# Altium PCB PBC-full.PcbDoc
Units mil, origin at the board's own origin, x right, y up, seen from the top; angles counter-clockwise.
Board outline 3150 x 2575 mil, 2 copper layers (Top Layer, Bottom Layer); 75 components, 86 nets, 314 pads, 107 vias.
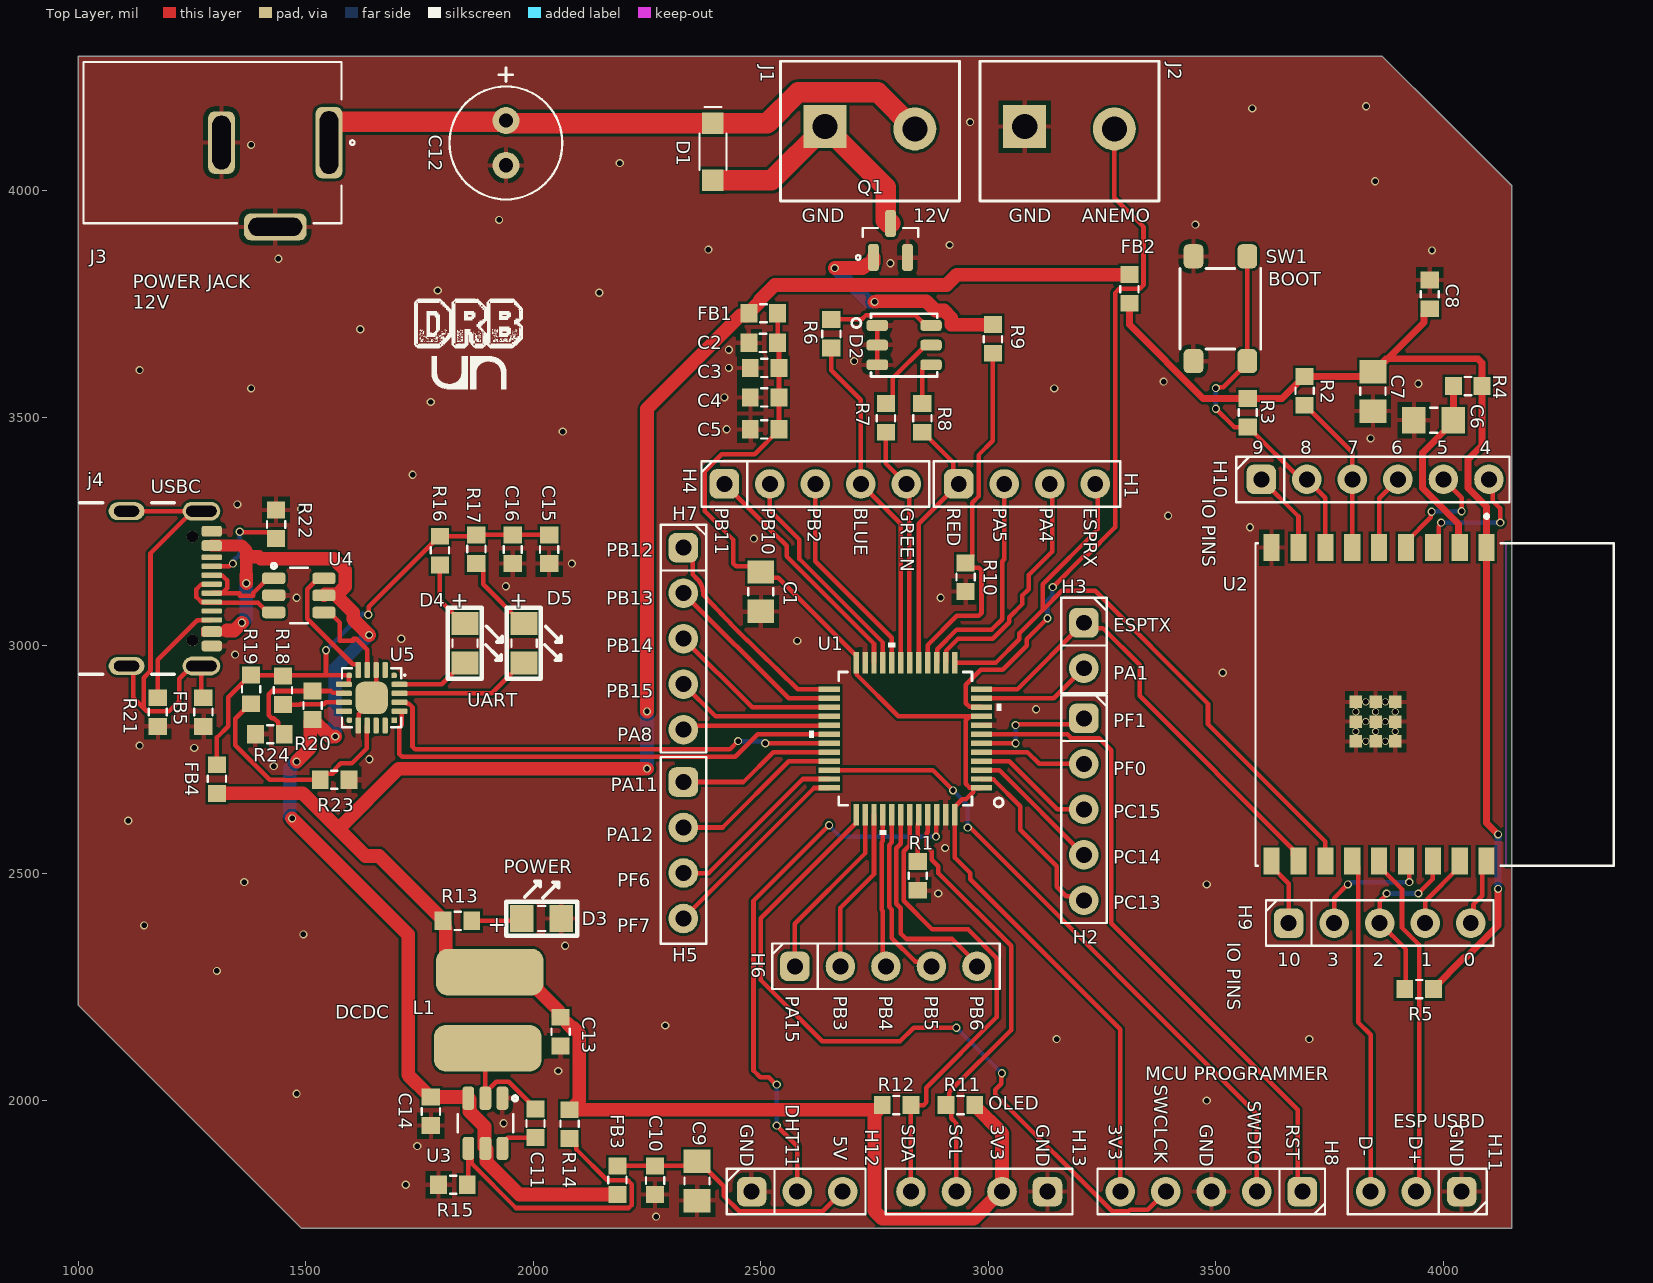
[diagram p0: Top Layer view]
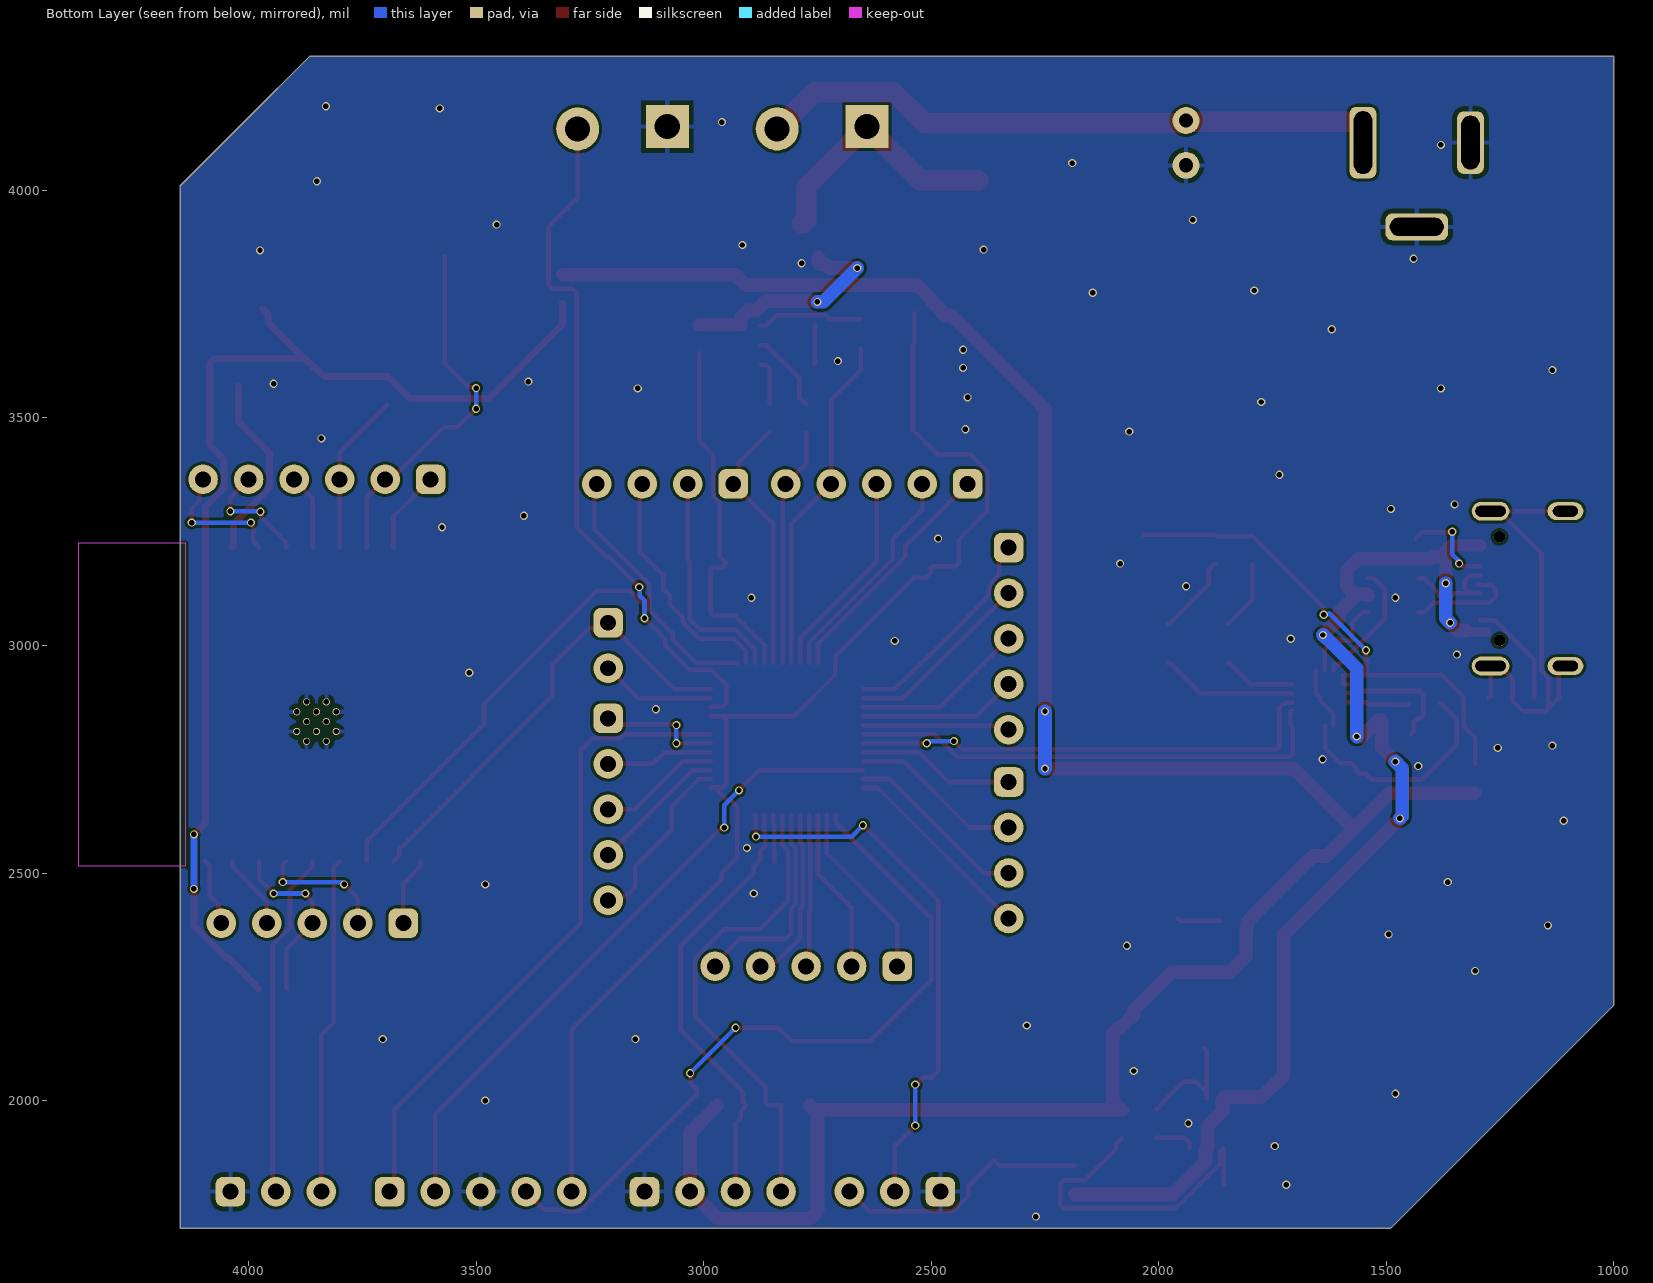
[diagram p1: Bottom Layer view, seen from below]
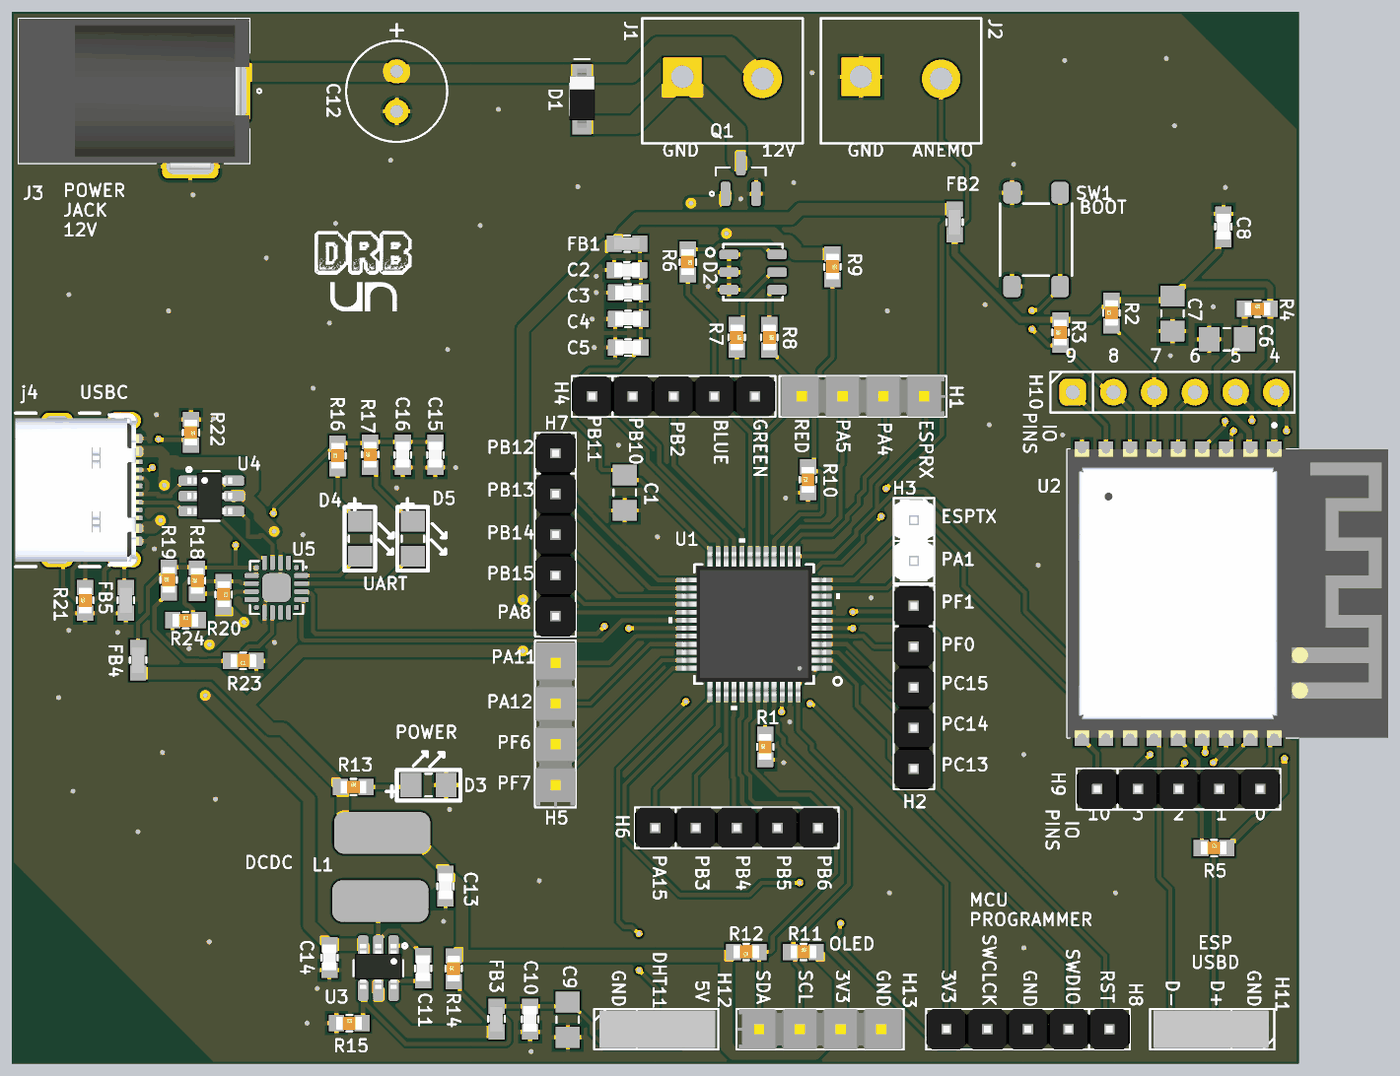
[diagram p2: 3D render of the assembled board from above, using the file's embedded part models]

## Layer stack, top to bottom
Top Solder: solder mask 0.4, Solder Resist, Dk 3.5
Top Layer: signal copper 1.4
Dielectric 1: dielectric 12.6, FR-4, Dk 4.8
Bottom Layer: signal copper 1.4
Bottom Solder: solder mask 0.4, Solder Resist, Dk 3.5

## Board outline
1490,1720 1000,2210 1000,4295 3865,4295 4005,4155 4150,4010 4150,1720

## Design rules (kind name [scope] priority, off if disabled: settings)
Clearance [All] p1: gap=6 ignorepadtopadclearanceinfootprint=FALSE
DiffPairsRouting DiffPairsRouting_USB [InDifferentialPairClass('USB_2.0_MCU') and InDifferentialPairClass('USB_2.0_ESP')] p1: maxlimit=6 minlimit=6 mostfreqgap=6 toplayer_minwidth=11 toplayer_maxwidth=31 toplayer_prefwidth=31 bottomlayer_minwidth=11 bottomlayer_maxwidth=31 bottomlayer_prefwidth=31 maxuncoupledlength=500
HoleSize [All] p1: absolutevalues=TRUE maxlimit=1000 minlimit=10 maxpercent=80.000 minpercent=20.000
MatchedLengths [InDifferentialPairClass('USB_2.0_MCU') and InDifferentialPairClass('USB_2.0_ESP')] p1: tolerance=50 checknetsindiffpair=TRUE checkdiffpairvsdiffpair=FALSE checkxsignals=FALSE checkothers=FALSE
MinimumSolderMaskSliver [All] p1: minsoldermaskwidth=4
PolygonConnect PolygonConnect_via [IsVia] p1: connectstyle=Direct reliefconductorwidth=10 reliefentries=4 polygonreliefangle="90 Angle" airgapwidth=10
PolygonConnect [All] p2: connectstyle=Relief reliefconductorwidth=10 reliefentries=4 polygonreliefangle="90 Angle" airgapwidth=10
RoutingVias [All] p1: holewidth=12 width=18 viastyle="Through Hole" minholewidth=12 minwidth=18 maxholewidth=1000 maxwidth=1000
SilkToSilkClearance [All] p1: silktosilkclearance=1
SilkToSolderMaskClearance [IsPad] p1: minsilkscreentomaskgap=1 clearancetoexposedcopper=TRUE
SolderMaskExpansion [All] p1: expansion=4 istentingtop=FALSE
SupplyNets "Schematic Supply Nets_6" [InNet('3V3_ESP32')] p1: voltage=0.000
SupplyNets "Schematic Supply Nets_5" [InNet('3V3_CP')] p2: voltage=0.000
SupplyNets "Schematic Supply Nets_4" [InNet('VUSB')] p3: voltage=0.000
SupplyNets "Schematic Supply Nets_3" [InNet('3V3_MCU')] p4: voltage=0.000
SupplyNets "Schematic Supply Nets_2" [InNet('3V3')] p5: voltage=0.000
SupplyNets "Schematic Supply Nets_1" [InNet('GND')] p6: voltage=0.000
SupplyNets "Schematic Supply Nets" [InNet('12V')] p7: voltage=0.000
Width Width_2A [InNetClass('12V_2A')] p1: maxlimit=45 minlimit=10 preferedwidth=45
Width Width_1A [InNetClass('5V_1A')] p2: maxlimit=30 minlimit=10 preferedwidth=30
Width Width_3V3_1A [InNet('3V3')] p3: maxlimit=30 minlimit=10 preferedwidth=30
Width Width_0.5A [InNet('3V3_ESP32')] p4: maxlimit=20 minlimit=15 preferedwidth=20
Width [All] p5: maxlimit=60 minlimit=6 preferedwidth=10
25 further rules are at their usual default settings.

## Classes and differential pairs
differential pair class USB_2.0_MCU: DATA USB_D
differential pair class USB_2.0_ESP: ESP_USBD
net class 12V_2A: 12V NetD1_2
net class 5V_1A: 3V3 NetC11_1 NetC11_2 VUSB
component class Designator: C9 C10 D1 D2 FB3 H12 J1 J2 Q1 R6 R7 R8 R9 R10 R11 R12 SDA
differential pair USB_D: +USB_D_P -USB_D_N
differential pair ESP_USBD: +ESP_USBD_P -ESP_USBD_N
differential pair DATA: +DATA_P -DATA_N

## Components (designator, comment, footprint, x,y, rotation, side; value= is the part's Value field where it differs from the comment)
C1 "10uF 25V" 0805_cap 2500,3118.31 r270 top value=10uF
C2 "0.1uF 50V" 0603_cap 2505.5,3665 r180 top value=0.1uF
C3 "0.1uF 50V" 0603_cap 2508.5,3610 r180 top value=0.1uF
C4 "0.1uF 50V" 0603_cap 2508.5,3545 r180 top value=0.1uF
C5 "0.1uF 50V" 0603_cap 2508.5,3475 r180 top value=0.1uF
C6 "10uF 25V" 0805_cap 3978.31,3495 r180 top value=10uF
C7 "10uF 25V" 0805_cap 3845,3558.31 r270 top value=10uF
C8 "0.1uF 50V" 0603_cap 3970,3771.5 r90 top value=0.1uF
C9 "10uF 25V" 0805_cap 2360,1823.31 r270 top value=10uF
C10 "0.1uF 50V" 0603_cap 2267.74,1825 r270 top value=0.1uF
C11 "0.1uF 50V" 0603_cap 2005,1950 r270 top value=0.1uF
C12 "100uF 35V" CAP_TH_2.5MM_6.3*12MM 1940,4104.21 r270 top value=100uF
C13 "22uF 10V" 0603_cap 2060,2151.5 r270 top value=22uF
C14 "10uF 10V" 0603_cap 1775,1976.5 r270 top value=10uF
C15 "10uF 10V" 0603_cap 2035,3211.5 r270 top value=10uF
C16 "0.1uF 50V" 0603_cap 1955,3211.5 r270 top value=0.1uF
D1 "40V 1A" SOD_123 2395,4085 r270 top
D2 "RGB" RGB_NS_3.5X3.7 2815,3660 r0 top
D3 "2.9V" 0805_LED 2018.31,2400 r0 top
D4 "2.9V" 0805_LED 1850,3005 r270 top
D5 "2V" 0805_LED 1980,3005 r270 top
FB1 "60OHM 2A" 0603_fb 2505.5,3730 r0 top value="60 OHM"
FB2 "60OHM 2A" 0603_fb 3310,3783.5 r270 top value="60 OHM"
FB3 "60OHM 2A" 0603_fb 2185,1825 r90 top value="60 OHM"
FB4 "60OHM 2A" 0603_fb 1305,2706.5 r90 top value="60 OHM"
FB5 "60OHM 2A" 0603_fb 1275,2853.5 r90 top value="60 OHM"
H1 "4x1" H_4x1_TH_2.54mm 3085,3355 r0 top
H2 "5x1" H_5x1_TH_100mil 3210,2640 r270 top
H3 "2x1" H_2x1_TH_100mil 3210,3000 r270 top
H4 "5x1" H_5x1_TH_100mil 2620,3355 r0 top
H5 "4x1" H_4x1_TH_2.54mm 2330,2550 r270 top
H6 "5x1" H_5x1_TH_100mil 2775,2295 r0 top
H7 "5x1" H_5x1_TH_100mil 2330,3015 r270 top
H8 "5x1" H_5x1_TH_100mil 3490,1800 r180 top
H9 "5x1" H_5x1_TH_100mil 3860,2390 r0 top
H10 "6x1" H_6x1_TH_100mil 3850,3365 r0 top
H11 "3x1" H_3X1_TH_100mil 3940,1800 r180 top
H12 "3x1" H_3X1_TH_100mil 2580,1800 r0 top
H13 "4x1" H_4x1_TH_2.54mm 2980,1800 r180 top
J1 "Connector 2pos" CON_2x1_TH_5MM 2740,4130 r0 top
J2 "Connector 2pos" CON_2x1_TH_5MM 3178.43,4130 r0 top
J3 "PWR JACK 2.1mm" CON_POWER_BARREL_2.1MM_3CONN 1433.11,4105 r270 top
j4 "USB C" CON_USB_C_16P_RA 1200,3125 r270 top
L1 "2.2uH 4A" Ind_5.8*5.2_NS 1902.1,2198.66 r90 top value=2.2uH
Q1 "N CH" SOT_23_3 2785,3890 r90 top
R1 "10k 1/10W" 0603_res 2845,2493.5 r90 top value=10k
R2 "1k 1/10W" 0603_res 3695,3559.5 r90 top value=1k
R3 "1k 1/10W" 0603_res 3570,3511.5 r90 top value=1k
R4 "1k 1/10W" 0603_res 4053.5,3570 r0 top value=1k
R5 "1k 1/10W" 0603_res 3946.5,2245 r0 top value=1k
R6 "100R 1/10W" 0603_res 2655,3685 r270 top value=100R
R7 "100R 1/10W" 0603_res 2775,3500 r270 top value=100R
R8 "100R 1/10W" 0603_res 2855,3500 r270 top value=100R
R9 "10k 1/10W" 0603_res 3010,3673.5 r270 top value=10k
R10 "10k 1/10W" 0603_res 2950,3150 r90 top value=10k
R11 "10k 1/10W" 0603_res 2938.5,1990 r0 top value=10k
R12 "10k 1/10W" 0603_res 2798.5,1990 r180 top value=10k
R13 "84R5 1/10W" 0603_res 1833.5,2395 r0 top value=84R5
R14 "33k2 1/10W" 0603_res 2080,1948.5 r90 top value=33k2
R15 "10k 1/10W" 0603_res 1823.5,1815 r0 top value=10k
R16 "84R5 1/10W" 0603_res 1795,3208.5 r90 top value=84R5
R17 "150R 1/10W" 0603_res 1875,3211.5 r90 top value=150R
R18 "1k 1/10W" 0603_res 1450,2901.5 r90 top value=1k
R19 "10k 1/10W" 0603_res 1380,2903.5 r90 top value=10k
R20 "33k2 1/10W" 0603_res 1515,2868.5 r270 top value=33k2
R21 "4k7 1/10W" 0603_res 1175,2853.5 r90 top value=4k7
R22 "4k7 1/10W" 0603_res 1435,3266.5 r270 top value=4k7
R23 "10k 1/10W" 0603_res 1563.5,2705 r180 top value=10k
R24 "54k9 1/10W" 0603_res 1421.5,2805 r0 top value=54k9
SW1 "Sw" Sw_PUSH_4.5x4.5x5mm 3510,3740 r90 top
U1 "STM32F030C8T6TR" LQFP48_7x7mm 2817.68,2795.16 r180 top
U2 "ESP32-C3-WROOM-02-N4" ESP32-C3-WROOM-02-N4 3858.78,2870.51 r270 top
U3 "TPS564201DDCR" SOT_23_6 1895,1950 r270 top
U4 "USBLC6-2SC6" SOT_23_6 1485,3110 r0 top
U5 "CP2102N-A02-GQFN20R" WFQFN_20_EP_3X3MM 1645,2885 r270 top

## Footprints (in the part's own frame and the unit in brackets; to place one, negate y for a bottom-side part, rotate by r counter-clockwise, add the part's x,y. Pads: shape width x height; smd on the part's side, far side on the other; paste and mask are expansions set on the pad)
0603_cap [mil]
  rect 37x40 smd: 1(-31.5,0) 2(31.5,0)
  silkscreen extent -7,-20 8,20, body extent -31,-17 31,17, height 34
0603_fb [mil]
  rect 37x40 smd: 1(-31.5,0) 2(31.5,0)
  silkscreen extent -6,-20 8,20, body extent -32,-16 31,16, height 32
0603_res [mil] "1608 Metric / 20190225 / C-A.Serna.A"
  rect 37x40 smd: 1(-31.5,0) 2(31.5,0)
  silkscreen extent -7,-20 8,20, body extent -31,-16 32,16, height 12
0805_cap [mm]
  rect 1.3x1.5 smd: 1(-1.1,0) 2(1.1,0)
  silkscreen extent -0.2,-0.7 0.2,0.7, body extent -1.13,-0.7 1.07,0.7, height 1
0805_LED [mm]
  rect 1.3x1.5 smd: 1(-1.1,0) 2(1.1,0)
  silkscreen extent -1.98,-0.97 1.98,2.07, body extent -1,-0.62 1,0.63, height 1.1
CAP_TH_2.5MM_6.3*12MM [mm]
  round 1.5 hole 0.8: 1(-1.25,0) 2(1.25,0)
  silkscreen extent -4.19,-3.15 3.15,3.15, body extent -3.15,-3.15 3.15,3.15, height 12
CON_2x1_TH_5MM [mm]
  rect 2.4x2.4 hole 1.4: 1(-2.5,0.254)
  round 2.4 hole 1.4: 2(2.5,0.127)
  silkscreen extent -5,-3.9 5,3.9, body extent -5,-3.9 5,3.9, height 10.2
CON_POWER_BARREL_2.1MM_3CONN [mm]
  rrect50% 4x1.5 hole 1.016 slot 3.5 at 0 deg: 1(0,3)
  rrect50% 3.5x1.5 hole 1.016 slot 3 at 0 deg: 2(0,-3)
  rrect50% 1.5x3.5 hole 1.016 slot 3 at 90 deg: 3(4.7,0)
  silkscreen extent -4.5,-10.7 4.5,4.43, body extent -4.5,-10.7 4.9,3.7, height 11
CON_USB_C_16P_RA [mm]
  oval 1.05x2.1 hole 0.6 slot 1.7 at 90 deg: 0(-4.32,1.803) 0(4.32,1.803)
  oval 1x2 hole 0.6 slot 1.4 at 90 deg: 0(-4.32,-2.377) 0(4.32,-2.377)
  rrect50% 0.6x1.15 smd mask+0.046: A1/B12(-3.2,2.378) A4/B9(-2.4,2.378) B1/A12(3.2,2.378) B4/A9(2.4,2.378)
  rrect50% 0.3x1.15 smd mask+0.046: A5(-1.25,2.378) A6(-0.25,2.378) A7(0.25,2.378) A8(1.25,2.378) B5(1.75,2.378) B6(0.75,2.378) B7(-0.75,2.378) B8(-1.75,2.378)
  round 0.65 hole 0.65 unplated mask+0.046: ""(-2.89,1.303) ""(2.89,1.303)
  silkscreen extent -4.79,-4.98 4.79,0.27, body extent -4.79,-4.98 4.79,2.73, height 3.31
ESP32-C3-WROOM-02-N4 [mm]
  rect 1.5x0.9 smd: 1(-8.75,6) 2(-8.75,4.5) 3(-8.75,3) 4(-8.75,1.5) 5(-8.75,0) 6(-8.75,-1.5) 7(-8.75,-3) 8(-8.75,-4.5) 9(-8.75,-6) 10(8.75,-6) 11(8.75,-4.5) 12(8.75,-3) 13(8.75,-1.5) 14(8.75,0) 15(8.75,1.5) 16(8.75,3) 17(8.75,4.5) 18(8.75,6)
  rect 0.7x0.7 smd: 19(-0.14,0.9) 19(-0.14,-0.2) 19(-0.14,-1.3) 19(0.96,0.9) 19(0.96,-0.2) 19(0.96,-1.3) 19(2.06,-0.2) 19(2.06,0.9) 19(2.06,-1.3)
  round 0.4 hole 0.3 mask+0: 19(-0.14,0.35) 19(-0.14,-0.75) 19(0.41,0.9) 19(0.41,-0.2) 19(0.41,-1.3) 19(0.96,0.35) 19(0.96,-0.75) 19(1.51,0.9) 19(1.51,-0.2) 19(1.51,-1.3) 19(2.06,-0.75) 19(2.06,0.35)
  Keep-Out Layer region: 9,7.1 -9,7.1 -9,13.1 9,13.1
  Keep-Out Layer region: 9,7.1 -9,7.1 -9,13.1 9,13.1
  silkscreen extent -10.6,-6.9 9,13.1, body extent -9,-6.9 9,13.1, height 3.35
H_2x1_TH_100mil [mil]
  rrect50% 65x65 hole 35: 1(-50,0)
  round 65 hole 35: 2(50,0)
  silkscreen extent -105,-50 105,50, body extent -101,-49 99,49, height 339
H_3X1_TH_100mil [mil]
  rrect50% 65x65 hole 35: 1(-100,0)
  round 65 hole 35: 2(0,0) 3(100,0)
  silkscreen extent -155,-50 150,50, body extent -142,-46 142,46, height 320
H_4x1_TH_2.54mm [mil]
  rrect50% 65x65 hole 35: 1(-150,0)
  round 65 hole 35: 2(-50,0) 3(50,0) 4(150,0)
  silkscreen extent -205,-50 205,50, body extent -200,-50 205,50, height 420
H_5x1_TH_100mil [mil]
  rrect50% 65x65 hole 35: 1(-200,0)
  round 65 hole 35: 2(-100,0) 3(0,0) 4(100,0) 5(200,0)
  silkscreen extent -250,-50 250,50, body extent -250,-49 250,49, height 335
H_6x1_TH_100mil [mil]
  rrect50% 65x65 hole 35: 1(-250,0)
  round 65 hole 35: 2(-150,0) 3(-50,0) 4(50,0) 5(150,0) 6(250,0)
  silkscreen extent -305,-50 295,50
Ind_5.8*5.2_NS [mm]
  rrect50% 2.6x6 smd: 1(-2.125,0.053) 2(2.125,-0.053)
  body extent -3,-2.75 3,2.75, height 4.5
LQFP48_7x7mm [mil]
  rect 47x12 smd paste+0 mask+1.8: 1(-167.32,108.27) 2(-167.32,88.58) 3(-167.32,68.9) 4(-167.32,49.21) 5(-167.32,29.53) 6(-167.32,9.84) 7(-167.32,-9.84) 8(-167.32,-29.53) 9(-167.32,-49.21) 10(-167.32,-68.9) 11(-167.32,-88.58) 12(-167.32,-108.27) 25(167.32,-108.27) 26(167.32,-88.58) 27(167.32,-68.9) 28(167.32,-49.21) 29(167.32,-29.53) 30(167.32,-9.84) 31(167.32,9.84) 32(167.32,29.53) 33(167.32,49.21) 34(167.32,68.9) 35(167.32,88.58) 36(167.32,108.27)
  rect 12x47 smd paste+0 mask+1.8: 13(-108.27,-167.32) 14(-88.58,-167.32) 15(-68.9,-167.32) 16(-49.21,-167.32) 17(-29.53,-167.32) 18(-9.84,-167.32) 19(9.84,-167.32) 20(29.53,-167.32) 21(49.21,-167.32) 22(68.9,-167.32) 23(88.58,-167.32) 24(108.27,-167.32) 37(108.27,167.32) 38(88.58,167.32) 39(68.9,167.32) 40(49.21,167.32) 41(29.53,167.32) 42(9.84,167.32) 43(-9.84,167.32) 44(-29.53,167.32) 45(-49.21,167.32) 46(-68.9,167.32) 47(-88.58,167.32) 48(-108.27,167.32)
  silkscreen extent -215,-211 211,211, body extent -177,-177 177,177, height 63
RGB_NS_3.5X3.7 [mm]
  rrect50% 1.2x0.6 smd: 1(-1.5,1.1) 2(-1.5,0) 3(-1.5,-1.1) 4(1.5,-1.1) 5(1.5,0) 6(1.5,1.1)
  silkscreen extent -2.92,-1.75 1.85,1.75, body extent -1.85,-1.74 1.85,1.75, height 1
SOD_123 [mm]
  rect 1.2x1.2 smd: 1(-1.6,0) 2(1.6,0)
  silkscreen extent -2.5,-0.75 1,0.75, body extent -1.93,-0.8 1.77,0.8, height 1.28
SOT_23_3 [mm]
  rrect50% 1.5x0.6 smd: 1(-0.95,0.95) 2(-0.95,-0.95) 3(0.95,0)
  silkscreen extent -1.07,-1.55 0.7,1.92, body extent -0.7,-1.52 0.7,1.53, height 1.12
SOT_23_6 [mm]
  rrect50% 1.3x0.65 smd mask+0.064: 1(-1.4,0.95) 2(-1.4,0) 3(-1.4,-0.95) 4(1.4,-0.95) 5(1.4,0) 6(1.4,0.95)
  silkscreen extent -1.52,-1.55 0.5,1.78, body extent -1.5,-1.45 1.3,1.45, height 1.45
Sw_PUSH_4.5x4.5x5mm [mm]
  rrect50% 1.35x1.1 smd: 1(-2.925,1.5) 1(2.925,1.5) 2(-2.925,-1.5) 2(2.925,-1.5)
  silkscreen extent -2.25,-2.25 2.25,2.25, body extent -2.25,-2.25 2.25,2.25, height 5
WFQFN_20_EP_3X3MM [mm]
  rrect50% 0.3x0.3 smd mask+0.046: 1(-1.25,1.25) 6(-1.25,-1.25) 11(1.25,-1.25)
  rrect50% 0.9x0.3 smd mask+0.046: 2(-1.55,0.75) 3(-1.55,0.25) 4(-1.55,-0.25) 5(-1.55,-0.75) 12(1.55,-0.75) 13(1.55,-0.25) 14(1.55,0.25) 15(1.55,0.75)
  rrect50% 0.3x0.9 smd mask+0.046: 7(-0.75,-1.55) 8(-0.25,-1.55) 9(0.25,-1.55) 10(0.75,-1.55) 17(0.75,1.55) 18(0.25,1.55) 19(-0.25,1.55) 20(-0.75,1.55)
  rect 0.3x0.3 smd mask+0.046: 16(1.25,1.25)
  rrect50% 1.8x1.8 smd mask+0.046: 21(0,0)
  silkscreen extent -1.65,-1.65 1.65,1.9, body extent -1.5,-1.5 1.5,1.5, height 0.8

## Part data
C1 C6 C7 C9: library part Cap_10uF_0805_25V_, "25V 10uF X5R ±10% 0805 Multilayer Ceramic Capacitors MLCC - SMD/SMT ROHS", Manufacturer="Samsung Electro-Mechanics", Manufacturer Part Number=CL21A106KAYNNNE, Supplier Part Number 1=C15850, ComponentLink1Description=LCSC, ComponentLink1URL=https://lcsc.com/product-detail/Multilayer-Ceramic-Capacitors-MLCC-SMD-SMT_Samsung-Electro-Mechanics-CL21A106KAYNNNE_C15850.html, Supplier 1=LCSC
C2 C3 C4 C5 C8 C10 C11 C16: library part Cap_0.1uF_0603_50V, "50V 100nF Y5V -20%~+80% 0603 Multilayer Ceramic Capacitors MLCC - SMD/SMT ROHS", Manufacturer="Walsin Tech Corp", Manufacturer Part Number=0603F104Z500CT, Supplier Part Number 1=C83060, ComponentLink1Description=LCSC, ComponentLink1URL=https://www.lcsc.com/product-detail/Multilayer-Ceramic-Capacitors-MLCC-SMD-SMT_Walsin-Tech-Corp-0603F104Z500CT_C83060.html, Supplier 1=LCSC
C12: library part Cap_100uF_ALU_TH_35V, "100uF 35V ±20% Plugin,D6.3xL12mm Aluminum Electrolytic Capacitors - Leaded ROHS", Manufacturer=HRK, Manufacturer Part Number="35V100uF CD110", Supplier Part Number 1=C2960381, ComponentLink1Description=LCSC, ComponentLink1URL=https://lcsc.com/product-detail/Aluminum-Electrolytic-Capacitors-Leaded_HRK-35V100uF-CD110_C2960381.html, Supplier 1=LCSC
C13: library part Cap_22uF_0603_10V, "10V 22uF X5R ±20% 0603 Multilayer Ceramic Capacitors MLCC - SMD/SMT ROHS", Manufacturer=HRE, Manufacturer Part Number=CGA0603X5R226M100JT, Supplier Part Number 1=C6119863, ComponentLink1Description=LCSC, ComponentLink1URL=https://lcsc.com/product-detail/Multilayer-Ceramic-Capacitors-MLCC-SMD-SMT_HRE-CGA0603X5R226M100JT_C6119863.html, Supplier 1=LCSC
C14 C15: library part Cap_10uF_0603_10V, "10V 10uF X5R ±10% 0603 Multilayer Ceramic Capacitors MLCC - SMD/SMT ROHS", Manufacturer=CCTC, Manufacturer Part Number=TCC0603X5R106K100CT, Supplier Part Number 1=C380314, ComponentLink1Description=LCSC, ComponentLink1URL=https://www.lcsc.com/product-detail/Multilayer-Ceramic-Capacitors-MLCC-SMD-SMT_CCTC-TCC0603X5R106K100CT_C380314.html, Supplier 1=LCSC
D1: library part D_Schottky_40V_1A_SOD_123F, "DIODE SCHOTTKY 40V 1A SOD123F", Manufacturer="Shanghai Prisemi Elec", Manufacturer Part Number=PSBD1DF40V1H, Supplier Part Number 1=C110730, ComponentLink1Description=LCSC, ComponentLink1URL=https://www.lcsc.com/product-detail/Switching-Diode_Shanghai-Prisemi-Elec-PSBD1DF40V1H_C110730.html, Supplier 1=LCSC
D2: library part LED_RGB_3535_SMD, "-30℃~+85℃ RGB 110° 3535(mm) Light Emitting Diodes (LED) ROHS", Manufacturer="Foshan NationStar Optoelectronics", Manufacturer Part Number=RS-3535MWAM, Supplier Part Number 1=C842778, ComponentLink1Description=LCSC, ComponentLink1URL=https://www.lcsc.com/product-detail/Light-Emitting-Diodes-LED_Foshan-NationStar-Optoelectronics-RS-3535MWAM_C842778.html, Supplier 1=LCSC
D3 D4: library part LED_0805_Green, "LED GREEN CLEAR 0805 SMD", Manufacturer=XINGLIGHT, Manufacturer Part Number=XL-2012UGC, Supplier Part Number 1=C965815, ComponentLink1Description=LCSC, ComponentLink1URL=https://www.lcsc.com/product-detail/Light-Emitting-Diodes-LED_XINGLIGHT-XL-2012UGC_C965815.html, Supplier 1=LCSC
D5: library part LED_0805_RED, "LED RED CLEAR 0805 SMD", Manufacturer=XINGLIGHT, Manufacturer Part Number=XL-2012SURC, Supplier Part Number 1=C965812, ComponentLink1Description=LCSC, ComponentLink1URL=https://www.lcsc.com/product-detail/Light-Emitting-Diodes-LED_XINGLIGHT-XL-2012SURC_C965812.html, Supplier 1=LCSC
FB1 FB2 FB3 FB4 FB5: library part FB_60_0603_2A, "2A 1 100mΩ 60Ω@100MHz ±25% 0603 Ferrite Beads ROHS", Manufacturer=TAI-TECH, Manufacturer Part Number=HCB1608KF-600T20, Supplier Part Number 1=C369516, ComponentLink1Description=LCSC, ComponentLink1URL=https://www.lcsc.com/product-detail/Ferrite-Beads_TAI-TECH-HCB1608KF-600T20_C369516.html, Supplier 1=LCSC
H1 H5 H13: library part H_Male_4x1_TH_100mil, "H_Male_4x1_TH_100mil", ComponentLink1Description=LCSC
H2 H4 H6 H7 H8 H9: library part H_Male_5x1_TH_100mil, "H_Male_5x1_TH_100mil", ComponentLink1Description=LCSC
H3: library part H_Male_2x1_TH_100mil, "H_Male_2x1_TH_100mil", ComponentLink1Description=LCSC
H10: library part H_Male_6x1_TH_100mil, "H_Male_6x1_TH_100mil", ComponentLink1Description=LCSC
H11 H12: library part H_Male_3x1_TH_100mil, "H_Male_3x1_TH_100mil", ComponentLink1Description=LCSC
J1 J2: library part Con_2x1_TH_5mm, "2POS 5MM", Manufacturer=JILN, Manufacturer Part Number=JL126-50002G01, Supplier Part Number 1=C394556, ComponentLink1Description=Digi-Key, ComponentLink1URL=https://www.lcsc.com/product-detail/Screw-terminal_JILN-JL126-50002G01_C394556.html, Supplier 1=LCSC
J3: library part Con_Power_Jack_2.1mm_3pins, "CONN PWR JACK 2X5.5MM SOLDER", Manufacturer=HCTL, Manufacturer Part Number=HC-DC-005-2.0T, Supplier Part Number 1=C3010533, ComponentLink1Description=LCSC, ComponentLink1URL=https://www.lcsc.com/product-detail/AC-DC-Power-Connectors_HCTL-HC-DC-005-2-0T_C3010533.html, Supplier 1=LCSC
j4: library part CON_USB_TYPEC_16P, "3A USB 3.1 1 Surface Mount 16P Female -40℃~+85℃ Type-C SMD USB Connectors ROHS", Manufacturer="SHOU HAN", Manufacturer Part Number=TYPE-C-3.1-16PIN, Supplier Part Number 1=C7507405, ComponentLink1Description=LCSC, ComponentLink1URL=https://lcsc.com/product-detail/USB-Connectors_SHOU-HAN-TYPE-C-3-1-16PIN_C7507405.html, Supplier 1=LCSC
L1: library part Inductor_2.2uH_4A_5.8*5.2mm, "4A 2.2uH ±20% 22.1mΩ SMD,5.8x5.2mm Inductors (SMD) ROHS", Manufacturer="SHOU HAN", Manufacturer Part Number=CY54-2.2UH, Supplier Part Number 1=C2929427, ComponentLink1Description=LCSC, ComponentLink1URL=https://lcsc.com/product-detail/Inductors-SMD_SHOU-HAN-CY54-2-2UH_C2929427.html, Supplier 1=LCSC
Q1: library part Q_NFET_20V_3.2A_SOT23, "MOSFET N-CH 20V SOT23", Manufacturer=Doeshare, Manufacturer Part Number=DN2302S, Supplier Part Number 1=C2931750, ComponentLink1Description=LCSC, ComponentLink1URL=https://www.lcsc.com/product-detail/MOSFETs_Doeshare-DN2302S_C2931750.html, Supplier 1=LCSC
R1 R9 R10 R11 R12 R15 R19 R23: library part Res_10k_0603_1/10W, "RES SMD 10k OHM 5% 1/10W 0603", Manufacturer=FOJAN, Manufacturer Part Number=FRC0603J103TS, Supplier Part Number 1=C2930027, ComponentLink1Description=LCSC, ComponentLink1URL=https://www.lcsc.com/product-detail/Chip-Resistor-Surface-Mount_FOJAN-FRC0603J103TS_C2930027.html, Supplier 1=LCSC
  R11 R12 R19 R23: Usage=NM
R2 R3 R4 R5 R18: library part Res_1k_0603_1/10W, "RES SMD 1k OHM 5% 1/10W 0603", Manufacturer=FOJAN, Manufacturer Part Number="FRC0603J102 TS", Supplier Part Number 1=C2907113, ComponentLink1Description=LCSC, ComponentLink1URL=https://www.lcsc.com/product-detail/Chip-Resistor-Surface-Mount_FOJAN-FRC0603J102-TS_C2907113.html, Supplier 1=LCSC
R6 R7 R8: library part Res_100R_0603_1/10W, "RES SMD 100R OHM 5% 1/10W 0603", Manufacturer=FOJAN, Manufacturer Part Number="FRC0603J101 TS", Supplier Part Number 1=C2907089, ComponentLink1Description=LCSC, ComponentLink1URL=https://www.lcsc.com/product-detail/Chip-Resistor-Surface-Mount_FOJAN-FRC0603J101-TS_C2907089.html, Supplier 1=LCSC
R13 R16: library part Res_84R5_0603_1/10W, "100mW Thick Film Resistor 50V ±100ppm/℃ ±1% 84.5Ω 0603 Chip Resistor - Surface Mount ROHS", Manufacturer="LIZ Elec", Manufacturer Part Number=CR0603FA84R5G, Supplier Part Number 1=C101216, ComponentLink1Description=LCSC, ComponentLink1URL=https://lcsc.com/product-detail/Chip-Resistor-Surface-Mount_LIZ-Elec-CR0603FA84R5G_C101216.html, Supplier 1=LCSC
R14 R20: library part Res_33k2_0603_1/10W, "100mW Thick Film Resistor 75V ±100ppm/℃ ±1% 33.2kΩ 0603 Chip Resistor - Surface Mount ROHS", Manufacturer=YAGEO, Manufacturer Part Number=RC0603FR-0733K2L, Supplier Part Number 1=C185338, ComponentLink1Description=LCSC, ComponentLink1URL=https://lcsc.com/product-detail/Chip-Resistor-Surface-Mount_YAGEO-RC0603FR-0733K2L_C185338.html, Supplier 1=LCSC
R17: library part Res_150R_0603_1/10W, "100mW Thick Film Resistor 75V ±100ppm/℃ ±1% 150Ω 0603 Chip Resistor - Surface Mount ROHS", Manufacturer=RALEC, Manufacturer Part Number=RTT031500FTP, Supplier Part Number 1=C103302, ComponentLink1Description=LCSC, ComponentLink1URL=https://lcsc.com/product-detail/Chip-Resistor-Surface-Mount_RALEC-RTT031500FTP_C103302.html, Supplier 1=LCSC
R21 R22: library part Res_4k7_0603_1/10W, "100mW Thick Film Resistor 75V ±1% 4.7kΩ 0603 Chip Resistor - Surface Mount ROHS", Manufacturer=VO, Manufacturer Part Number=SCR0603F4K7, Supplier Part Number 1=C3016318, ComponentLink1Description=LCSC, ComponentLink1URL=https://lcsc.com/product-detail/Chip-Resistor-Surface-Mount_VO-SCR0603F4K7_C3016318.html, Supplier 1=LCSC
R24: library part Res_54k9_0603_1/10W, "100mW Thick Film Resistor 75V ±100ppm/℃ ±1% 54.9kΩ 0603 Chip Resistor - Surface Mount ROHS", Manufacturer=YAGEO, Manufacturer Part Number=RC0603FR-0754K9L, Supplier Part Number 1=C185321, ComponentLink1Description=LCSC, ComponentLink1URL=https://lcsc.com/product-detail/Chip-Resistor-Surface-Mount_YAGEO-RC0603FR-0754K9L_C185321.html, Supplier 1=LCSC
SW1: library part Sw_PUSH_4.5x4.5x5.0xmm, "SWITCH TACTILE SPST-NO 0.05A 12V", Manufacturer=BZCN, Manufacturer Part Number=TSC015A05026A, Supplier Part Number 1=C2888509, ComponentLink1Description=LCSC, ComponentLink1URL=https://www.lcsc.com/product-detail/Tactile-Switches_BZCN-TSC015A05026A_C2888509.html, Last modified by=N-A.Potosi, Last modified date=20190222, Supplier 1=LCSC
U1: library part IC_STM32F030C8T6TR_LQFP48_7x7MM, "IC MCU 32BIT 64KB FLASH 48LQFP", Manufacturer=STMicroelectronics, Supplier Part Number 1=C23922, ComponentLink1Description=LCSC, ComponentLink1URL=https://www.lcsc.com/product-detail/ST-Microelectronics_STMicroelectronics-STM32F030C8T6_C23922.html, Manufacturer Part Number=STM32F030C8T6TR, Supplier 1=LCSC
U2: library part MCU_ESP32-C3-WROOM-02-N4, "RF TXRX MOD BT WIFI PCB TH SMD", Manufacturer="Espressif Systems", Supplier Part Number 1=C2934560, ComponentLink1Description=LCSC, ComponentLink1URL=https://lcsc.com/product-detail/WiFi-Modules_Espressif-Systems-ESP32-C3-WROOM-02-N4_C2934560.html, Manufacturer Part Number=ESP32-C3-WROOM-02-N4, Supplier 1=LCSC
U3: library part DCDC_SW_BUCK_4A_SOT23-6, "IC REG BUCK ADJ 4A SOT23", Manufacturer="Texas Instruments", Supplier Part Number 1=C464812, ComponentLink1Description=LCSC, ComponentLink1URL=https://lcsc.com/product-detail/DC-DC-Converters_Texas-Instruments-TPS564201DDCR_C464812.html, Manufacturer Part Number=TPS564201DDCR, Supplier 1=LCSC
U4: library part TVS_5.25V_2CH_SOT_23_6, "TVS DIODE 5.25V 17V SOT23-6", Manufacturer=STMicroelectronics, Supplier Part Number 1=C7519, ComponentLink1Description=LCSC, ComponentLink1URL=https://www.lcsc.com/product-detail/ESD-Protection-Devices_STMicroelectronics-USBLC6-2SC6_C7519.html, Manufacturer Part Number=USBLC6-2SC6, Supplier 1=LCSC
U5: library part IC_SGL_USB2UART-BRIDGE_20QFN, "IC USB TO UART BRIDGE QFN20", Manufacturer="Silicon Labs", Supplier Part Number 1=C969913, ComponentLink1Description=LCSC, ComponentLink1URL=https://www.lcsc.com/product-detail/USB-ICs_SILICON-LABS-CP2102N-A02-GQFN20R_C969913.html, Manufacturer Part Number=CP2102N-A02-GQFN20R, Supplier 1=LCSC

## Via types
v1: diameter 18, hole 12, Top Layer to Bottom Layer, tented both sides, 67 vias
v2: diameter 18, hole 12, Top Layer to Bottom Layer, 40 vias

## Nets (pads, with @x,y where several pads share a name; then routed paths per layer and width w, separated by ;. In a path a pad name is that pad's centre, name@x,y a point inside that pad or via, vN(x,y) a via of type N, cw(c..) or ccw(c..) an arc to the next point about the centre after c; other vN are vias at no path point)
3V3: C13.1 FB1.1 FB2.1 FB4.1 H13.2 L1.2 R11.2 R12.2 R13.1 R14.2 | length 5404.6
  Top Layer w30: FB4.1 1493.8,2675 1571.9,2596.9 ; C13.1 2058.5,2183 2055,2186.5 2055,2198.46 1971.14,2282.32 L1.2 1843.4,2282.32 1808.03,2317.7 1808.03,2378.5 1805.5,2381.03 1805.5,2391.5 R13.1 1802,2396.5 1661,2537.5 1631.3,2537.5 1571.9,2596.9 ; C13.1@2061.5,2183 2085,2159.5 2088.7,2159.5 2101,2147.2 2101,1999.5 R14.2@2081.5,1980 ; R14.2 R14.2@2081.5,1980 ; v2(2250,2729.5) 1704.5,2729.5 1571.9,2596.9 ; v2(2250,2855) 2250,3520 2455,3725 2470.5,3725 2474,3728.5 FB1.1 ; FB1.1@2474,3731.5 2497.5,3755 2497.5,3758.7 2530.87,3792.07 2908.22,3792.07 2931.15,3815 FB2.1 ; R11.2 2970,1988.5 3030,1928.5 H13.2 3027.4,1800 2967.4,1740 2767.57,1740 2750,1757.57 2750,1971.5 R12.2@2767,1988.5 ; R14.2@2081.5,1980 2758.5,1980 R12.2@2767,1988.5 ; R12.2@2767,1988.5 R12.2 R12.2@2767,1988.5
  Bottom Layer w30: v2(2250,2729.5) v2(2250,2855)
3V3_CP: C15.1 C16.1 FB4.2 R16.2 R17.2 R18.2 R19.2 U5.6 U5.7 | length 1141.6
  Top Layer w10: FB4.2 1305,2797.94 1329.5,2822.44 1329.5,2886 1378.5,2935 R19.2 1448,2935 R18.2 1451.21,2934.21 1540,2934.21 ; v2(1544.62,2989.62) 1544.62,2938.83 1540,2934.21 ; U5.7 1593.98,2914.53 1594.88,2915.43 1594.88,2933.31 U5.6 1540,2934.21 ; v2(1637.35,3067.35) 1638.88,3068.88 1638.88,3085.38 1793.5,3240 R16.2 1872,3240 R17.2 C16.1 C15.1
  Bottom Layer w10: v2(1544.62,2989.62) 1625.71,3070.71 1627.54,3068.88 1635.82,3068.88 v2(1637.35,3067.35)
3V3_ESP32: C7.1 C8.1 FB2.2 R2.2 R3.2 R4.2 R5.2 U2.1 | length 2581.6
  Top Layer w15: FB2.2 3310,3704.81 3471.81,3543 R3.2 3645.5,3543 3693.5,3591 R2.2 3834.39,3591 C7.1 3873.39,3630 3877.32,3630 ; C7.1@3858.8,3611.48 3877.32,3630 ; C8.1 3968.5,3740 3957.5,3729 3957.5,3710.18 3877.32,3630 ; R5.2 3978,2246.5 4045.72,2314.22 4049.28,2314.22 4120,2384.95 v2(4120,2465) ; v2(4120,2585) 4095,2610 U2.1 4095,3304.95 4054,3345.95 4054,3409 4085,3440 R4.2 4085,3621.21 4076.21,3630 3877.32,3630
  Bottom Layer w15: v2(4120,2465) v2(4120,2585)
3V3_MCU: C1.1 C2.1 C3.1 C4.1 C5.1 FB1.2 H8.5 U1.1 U1.9 U1.24 U1.48 | length 2662.1
  Top Layer w10: C1.1 2512.48,3149.13 2538.67,3149.13 2706.82,2980.98 2708.41,2980.98 2709.41,2979.98 U1.24 2710.41,2961.48 2710.41,2936.11 2802.15,2844.37 2956.94,2844.37 U1.9 ; C1.1@2503.76,3168.13 2497.99,3173.9 2445.86,3173.9 2440,3179.76 2440,3231.89 2376.5,3295.39 2376.5,3382.54 2413.96,3420 2486.5,3420 2540,3473.5 C5.1 C4.1 C3.1 2540,3662 C2.1 FB1.2 ; 2956.94,2841.69 2950.5,2835.24 2950.5,2696.02 2958.63,2687.89 2966.5,2687.89 2984,2687.89 U1.1 2967.5,2686.89 2966.5,2685.89 2966.5,2677.39 2950.97,2661.86 2942.47,2661.86 2925.94,2645.33 2925.94,2534.06 2960,2500 2960,2486.68 3290,2156.68 H8.5
12V: C12.1 D1.1 J1.2 J3.1 | length 1393.7
  Top Layer w45: J3.1 1551.22,4143.71 1558.25,4150.74 1937.31,4150.74 C12.1 1943.8,4153.43 1949.24,4147.99 D1.1 2514.77,4147.99 2582.53,4215.74 2756.9,4215.74 2837.64,4135 J1.2
ADC_ANEMO: J2.2 U1.10 | length 1546.6
  Top Layer w10: U1.10 2984,2865.06 2958.63,2865.06 2950.5,2873.18 2950.5,2913.98 2983,2946.48 3031.48,2946.48 3084.18,2999.18 3084.18,3014.18 v2(3130,3060) ; v2(3141.72,3128.28) 3208.04,3194.61 3213.7,3194.61 3278.5,3259.41 3278.5,3774.56 3287.44,3783.5 3332.56,3783.5 3341,3791.94 3341,3919.97 3276.85,3984.12 J2.2
  Bottom Layer w10: v2(3130,3060) 3130,3099.28 3140.19,3109.47 3140.19,3126.75 v2(3141.72,3128.28)
DATA_N: U4.6 U5.5 | length 276.7
  Top Layer w10: U4.6 1527.32,3147.4 1503.53,3123.61 1503.53,3058.99 1603.78,2958.74 1614.57,2958.74 1615.47,2957.83 U5.5
DATA_P: U4.4 U5.4 | length 203.5
  Top Layer w10: U4.4 1552.91,3072.6 1575.12,3050.39 1575.12,3010.03 1605.12,3010.03 1605.12,3014.54 1610.98,3014.54 1635,2990.51 1635.16,2990.35 U5.4
DHT11_PIN: H12.2 U1.46 | length 1219.1
  Top Layer w10: v2(2535,1945) 2580,1900 H12.2 ; v2(2535,2035) 2533.59,2035 2517.32,2051.27 2498.73,2051.27 2484,2066 2484,2439 v2(2650,2605) ; v2(2885,2580) 2885.79,2580.79 2885.79,2627.05 U1.46
  Bottom Layer w10: v2(2535,1945) v2(2535,2035) ; v2(2650,2605) 2675,2580 v2(2885,2580)
ESP_EN: C6.1 R4.1 U2.2 | length 417.1
  Top Layer w15: R4.1 4022,3495.39 C6.1 4021.61,3491.06 3954,3423.45 3954,3345.95 4032.92,3267.03 4032.92,3218.03 U2.2
ESP_IO0: H9.5 U2.18 | length 150.5
  Top Layer w10: H9.5 4066.09,2396.09 4066.09,2431.09 4085,2450 4085,2516.02 U2.18
ESP_IO1: H9.4 U2.17 | length 167.5
  Top Layer w10: H9.4 3960,2438.27 4035.94,2514.21 U2.17
ESP_IO2: H9.3 R5.1 U2.16 | length 394.9
  Top Layer w10: v2(3875,2455) 3875,2452.84 3860,2437.84 H9.3 3917,2333 3917,2247 R5.1 ; v2(3945,2455) 3976.89,2486.89 U2.16
  Bottom Layer w10: v2(3875,2455) v2(3945,2455)
ESP_IO3: H9.2 U2.15 | length 283.5
  Top Layer w10: H9.2 3760,2445 v2(3790,2475) ; U2.15 3925,2518.86 v2(3925,2480)
  Bottom Layer w10: v2(3790,2475) 3795,2480 v2(3925,2480)
ESP_IO4: H10.6 U2.3 | length 297.9
  Top Layer w10: U2.3 3989.61,3227.72 3989.61,3262.44 3995,3267.84 v2(3995,3270) ; H10.6 4108.61,3356.39 4108.61,3317.5 4125,3301.11 v2(4125,3270)
  Bottom Layer w10: v2(3995,3270) v2(4125,3270)
ESP_IO5: H10.5 U2.4 | length 255.2
  Top Layer w10: U2.4 3917.83,3226.81 3972.53,3281.51 3972.53,3292.53 v2(3974.06,3294.06) ; H10.5 4040,3325 v2(4040,3295)
  Bottom Layer w10: v2(3974.06,3294.06) 3974.53,3294.53 4039.53,3294.53 v2(4040,3295)
ESP_IO6: H10.4 U2.5 | length 167.1
  Top Layer w10: U2.5 3858.78,3323.78 H10.4
ESP_IO7: H10.3 R2.1 U2.6 | length 357.5
  Top Layer w10: R2.1 3696.5,3528 3800,3424.5 H10.3 3800,3215.28 U2.6
ESP_IO8: H10.2 R3.1 SW1.2 U2.7 | length 801.9
  Top Layer w10: v2(3500,3520) 3540,3480 R3.1 ; v2(3500,3565.5) 3501.53,3567.03 3516.16,3567.03 3569.06,3619.92 3569.06,3624.84 SW1.2@3569.06,3855.16 ; R3.1@3571.5,3480 3686.5,3365 H10.2 3740.67,3324.33 U2.7
  Bottom Layer w10: v2(3500,3520) v2(3500,3565.5)
ESP_IO9: H10.1 U2.8 | length 183.8
  Top Layer w10: H10.1 3681.61,3283.39 U2.8
ESP_IO10: H9.1 U2.10 | length 151.5
  Top Layer w10: U2.10 3622.56,2514.21 3660,2476.77 H9.1
ESP_RX: H1.4 U1.13 U2.12 | length 1514.1
  Top Layer w10: U1.13 3016.73,2962.48 3068.18,3013.93 3068.18,3026.46 3119.63,3077.91 ; H1.4 3240,3350 3240,3255 3119.63,3134.63 3119.63,3077.91 ; U2.12 3740.67,2569.33 3482.74,2827.26 3482.74,2872.26 3235,3120 3161.72,3120 3119.63,3077.91
ESP_TX: H3.1 U1.12 U2.11 | length 1022.6
  Top Layer w10: U1.12 3063.43,2903.43 H3.1 3221.64,3038.36 3251.64,3038.36 3332.35,2957.65 3332.35,2889.16 3668.9,2552.62 3668.9,2538.74 U2.11
ESP_USBD_N: H11.3 U2.13 | length 742.7
  Top Layer w10: U2.13 3812.44,2513.31 3812.44,2171.97 3840,2144.41 H11.3
ESP_USBD_P: H11.2 U2.14 | length 765.1
  Top Layer w10: U2.14 3858.78,2514.21 3909,2463.99 3909,2379.48 3946.5,2341.98 3946.5,1806.5 H11.2
GND: C1.2 C2.2 C3.2 C4.2 C5.2 C6.2 C7.2 C8.2 C9.2 C10.2 C12.2 C13.2 C14.2 C15.2 C16.2 D2.1 D2.2 D2.3 D3.2 FB5.1 H8.3 H11.1 H12.1 H13.1 J2.1 J3.2 J3.3 j4.A1/B12 j4.B1/A12 Q1.2 R1.1 R10.1 R15.1 R21.1 R22.1 R23.1 R24.1 SW1.1 U1.8 U1.23 U1.47 U2.9 U2.19 U3.1 U4.2 U5.3 U5.12 U5.21 | length 225
  Top Layer w10: U5.12 1616.38,2824.88 1616.38,2849.5 1645,2878.12 U5.21 1654.84,2894.84 U5.3 ; D2.3 D2.2 D2.1
  other v1: 2270,1745 1720,1815 1745,1900 1935,1950 3480,2000 1480,2015 2055,2065 3150,2135 3705,2135 2290,2165 1305,2285 2070,2340 1495,2365 1145,2385 2890,2455 3480,2475 1365,2480 2905,2555 1110,2615 1430,2735 1640,2750 1255,2775 1135,2780 3105,2860 3515,2940 1345,2980 2580,3010 1710,3015 1480,3105 2895,3105 1940,3130 2085,3180 2485,3235 3575,3260 3395,3285 1490,3300 1350,3310 1735,3375 3840,3455 2065,3470 2425,3475 1775,3535 2420,3545 1380,3565 3145,3565 3945,3575 3385,3580 1135,3605 2430,3610 2705,3625 2430,3650 1620,3695 2145,3775 1790,3780 2785,3840 1440,3850 3974.88,3867.98 2385,3870 2915,3880 3455,3925 1925,3935 3850,4020 2190,4060 1380,4100 2960,4150 3580,4180 3830,4185
NetC9_1: C9.1 C10.1 FB3.2 H12.3 | length 575.5
  Top Layer w10: FB3.2 C10.1 2349.89,1856.5 C9.1 2363.94,1866.61 2418.5,1812.06 2418.5,1790.47 2452.46,1756.5 2636.5,1756.5 H12.3
NetC11_1: C11.1 L1.1 U3.2 | length 271.1
  Top Layer w10: L1.1 1895,2110 U3.2 1895,2017.91 1918.8,2041.71 1946.01,2041.71 1990,1997.71 1990,1995 2003.5,1981.5 C11.1
NetC11_2: C11.2 U3.6 | length 89.4
  Top Layer w10: U3.6 1932.4,1906.92 1943.98,1918.5 C11.2
NetD1_2: D1.2 J1.1 Q1.3 | length 569.6
  Top Layer w45: D1.2 2523.58,4022.01 J1.1 2774.31,4007.26 2774.31,3934.43 2781.34,3927.4 Q1.3
NetD2_4: D2.4 R8.1 | length 99.7
  Top Layer w10: R8.1 2855,3608.96 2862.73,3616.69 D2.4
NetD2_5: D2.5 R7.1 | length 177.3
  Top Layer w10: R7.1 2776.5,3531.5 2790,3545 2790,3587.76 2862.24,3660 D2.5
NetD2_6: D2.6 R6.1 | length 232.5
  Top Layer w10: R6.1 2721.61,3716.5 2731.23,3726.12 2839.43,3726.12 2862.24,3703.31 D2.6
NetD3_1: D3.1 R13.2 | length 95.5
  Top Layer w10: R13.2 1953.39,2395 D3.1@1958.39,2400
NetD4_1: D4.1 R16.1 | length 153.8
  Top Layer w10: R16.1 1795,3099.37 1846.06,3048.31 D4.1
NetD4_2: D4.2 U5.20 | length 163.5
  Top Layer w10: U5.20 1798.9,2914.53 1846.06,2961.69 D4.2
NetD5_1: D5.1 R17.1 | length 178.4
  Top Layer w10: R17.1 1876.5,3180 1890,3166.5 1890,3134.37 1976.06,3048.31 D5.1
NetD5_2: D5.2 U5.19 | length 301.7
  Top Layer w10: U5.19 1909.21,2894.84 1976.06,2961.69 D5.2
NetFB5_2: FB5.2 j4.0 | length 1041.9
  Top Layer w10: j4.0@1106.4,2954.92 1107.52,2954.92 1121.08,2941.35 1121.08,2884.86 1144,2861.94 ; j4.0@1106.4,3295.08 1270.96,3295.08 1251.3,3295.08 1159,3202.78 1159,2944.44 1144,2929.44 1144,2861.94 ; FB5.2 1270.96,2889.04 1270.96,2954.92 1250.3,2954.92 1221.93,2926.55 1221.93,2877.87 1199.56,2855.5 1150.44,2855.5 1144,2861.94
Netj4_A5: j4.A5 R22.2 | length 211.2
  Top Layer w10: j4.A5 1332.05,3174.21 1337.84,3180 v2(1340,3180) ; v2(1355,3250) 1356.5,3248.5 1421.5,3248.5 R22.2
  Bottom Layer w10: v2(1340,3180) 1340,3185 1355,3200 v2(1355,3250)
Netj4_B5: j4.B5 R21.2 | length 238.4
  Top Layer w10: R21.2 1175,2968.59 1261.6,3055.2 1292.7,3055.2 j4.B5
NetQ1_1: Q1.1 R9.1 | length 509.8
  Top Layer w30: v2(2662.74,3829.38) 2724.38,3829.38 2733.07,3838.07 2744.41,3838.07 2747.6,3841.26 Q1.1 ; v2(2750,3755) 2753.93,3755 2755,3756.07 2780,3756.07 2863.93,3756.07 2883.88,3736.12 2902.92,3736.12 2918.68,3720.36 2918.68,3705 R9.1
  Bottom Layer w30: v2(2662.74,3829.38) 2737.12,3755 v2(2750,3755)
NetR1_2: R1.2 U1.44 | length 103.7
  Top Layer w10: R1.2 2845,2608.13 2847.2,2610.33 U1.44
NetR14_1: R14.1 R15.2 U3.4 | length 741.8
  Top Layer w10: R15.2 1857.6,1817.6 U3.4 1864.53,1887.95 1864.53,1861.65 1962.18,1764 2209.56,1764 2216,1770.44 2216,1816.56 2207.56,1825 2162.44,1825 2095,1892.44 2095,1903.5 2081.5,1917 R14.1
NetR18_1: R18.1 U5.9 | length 137.4
  Top Layer w10: R18.1 1486.94,2870 1488.94,2872 1490.44,2870.5 1539.56,2870.5 1544.21,2875.16 U5.9
PA1: H3.2 U1.11 | length 252.4
  Top Layer w10: U1.11 3143.74,2883.74 H3.2
PA4: H1.3 U1.14 | length 536.3
  Top Layer w10: U1.14 2907.26,2963.48 2907.26,2988.85 2933.41,3015 3010,3015 3046.22,3051.22 3046.22,3062.4 3075,3091.18 3075,3110 3088.78,3123.78 3088.78,3155 3140,3206.22 3140,3350 H1.3
PA5: H1.2 U1.15 | length 498.9
  Top Layer w10: U1.15 2887.57,2963.48 2887.57,2991.79 2930.78,3035 3007.37,3035 3030.22,3057.84 3030.22,3185.01 3035,3189.8 H1.2
PA8: H7.5 U1.29 | length 324.4
  Top Layer w10: H7.5 2338.69,2823.69 2649.35,2823.69 U1.29
PA11: H5.1 U1.32 | length 347.5
  Top Layer w10: H5.1 2461.93,2700 2527.56,2765.63 U1.32
PA12: H5.2 U1.33 | length 380.8
  Top Layer w10: H5.2 2415.9,2600 2561.84,2745.94 U1.33
PA15: H6.1 U1.38 | length 396.7
  Top Layer w10: H6.1 2575,2388.94 2729.09,2543.04 U1.38
PB2: H4.3 U1.20 | length 462.2
  Top Layer w10: H4.3 2620,3185 2788.15,3016.85 U1.20
PB3: H6.2 U1.39 | length 363.4
  Top Layer w10: H6.2 2675,2423.22 2748.78,2497 U1.39
PB4: H6.3 U1.40 | length 337.6
  Top Layer w10: U1.40 2768.46,2570.4 2766,2567.94 2766,2419.06 2768.46,2416.6 2768.46,2301.54 H6.3
PB5: H6.4 U1.41 | length 388.5
  Top Layer w10: U1.41 2788.15,2567.46 2782,2561.31 2782,2425.69 2788.15,2419.54 2788.15,2356.85 2839.48,2305.52 2864.48,2305.52 H6.4
PB6: H6.5 U1.42 | length 469.2
  Top Layer w10: U1.42 2807.83,2564.52 2798,2554.68 2798,2432.32 2807.83,2422.48 2807.83,2367.02 2819.86,2355 2920.57,2355 2975,2300.57 H6.5
PB10: H4.2 U1.21 | length 495.4
  Top Layer w10: H4.2 2520,3297.56 2585,3232.56 2585,3190 2768.46,3006.54 U1.21
PB11: H4.1 U1.22 | length 529.1
  Top Layer w10: H4.1 2528.41,3246.59 2529.08,3246.59 2556.71,3218.96 2556.71,3195.66 2748.78,3003.59 U1.22
PB12: H7.1 U1.25 | length 482.8
  Top Layer w10: H7.1 2350.56,3194.44 2350.56,3158.92 2350.56,3155.96 2360.76,3145.76 cw(c2330,3115) 2373.5,3114.41 2373.5,3111.5 2444.47,3036.55 2450.92,3030.1 2581.57,2903.43 2585.72,2903.43 U1.25
PB13: H7.2 U1.26 | length 416.1
  Top Layer w10: H7.2 2561.26,2883.74 U1.26
PB14: H7.3 U1.27 | length 382.9
  Top Layer w10: H7.3 2480.94,2864.06 U1.27
PB15: H7.4 U1.28 | length 349.6
  Top Layer w10: H7.4 2400.63,2844.37 U1.28
PC13: H2.5 U1.2 | length 392.2
  Top Layer w10: U1.2 2986,2705.57 3011.37,2705.57 3070,2646.95 3070,2595 3150,2515 3150,2470 3171.41,2448.59 3201.41,2448.59 H2.5
PC14: H2.4 U1.3 | length 302.2
  Top Layer w10: U1.3 3023.74,2726.26 H2.4
PC15: H2.3 U1.4 | length 268.9
  Top Layer w10: U1.4 3045.84,2745.94 3151.78,2640 H2.3
PF0: H2.2 U1.5 | length 236.1
  Top Layer w10: U1.5 3051.09,2765.63 3051.72,2765 3068.28,2765 3068.91,2765.63 3085.99,2765.63 3111.62,2740 H2.2
PF1: H2.1 U1.6 | length 271.3
  Top Layer w10: U1.6 2985.16,2785.16 3059.84,2785.16 v2(3060,2785) ; v2(3060,2825) 3061.53,2826.53 3196.53,2826.53 H2.1
  Bottom Layer w10: v2(3060,2785) v2(3060,2825)
PF6: H5.3 U1.35 | length 405.9
  Top Layer w10: H5.3 2385.58,2500 2592.16,2706.57 U1.35
PF7: H5.4 U1.36 | length 439.2
  Top Layer w10: H5.4 2616.89,2686.89 U1.36
R\S\T\: H8.1 U1.7 | length 1443.5
  Top Layer w10: U1.7 3173.96,2805 3182.46,2796.5 3243.5,2796.5 3270,2770 3270,2390 3680,1980 3680,1810 H8.1
SCL_OLED: H13.3 R11.1 U1.45 | length 972.5
  Top Layer w10: U1.45 2866.89,2590.17 2865,2588.28 2865,2559.06 2876,2548.06 2876,2529 2890,2515 2890,2500 3050,2340 3050,2155 2914.14,2019.14 2914.14,1997.14 R11.1 ; R11.1@2907,1988.5 2918.78,1976.72 2918.78,1960.85 2930,1949.64 H13.3
SDA_OLED: H13.4 R12.1 U1.43 | length 1058.4
  Top Layer w10: U1.43 2827.52,2561.58 2814,2548.06 2814,2438.94 2876.96,2375.98 2955.54,2375.98 3018.5,2313.02 3018.5,2183.5 2863.5,2028.5 2863.5,1995.86 2857.64,1990 R12.1 H13.4
SYS_SWCLCK: H8.4 U1.37 | length 1641.5
  Top Layer w10: U1.37 2709.41,2610.33 2500,2400.93 2500,2265 2635,2130 2805.9,2130 2835.9,2160 v2(2930,2160) ; v2(3030,2060) 3028.47,2058.47 3028.47,2036.95 3015,2023.48 3015,2013.48 3271.98,1756.5 3308.02,1756.5 3311.52,1760 3350,1760 H8.4
  Bottom Layer w10: v2(2930,2160) v2(3030,2060)
SYS_SWDIO: H8.2 U1.34 | length 1451.6
  Top Layer w10: U1.34 2877.7,2726.26 v2(2922.42,2681.53) ; v2(2955,2600) 2960,2600 3590,1970 H8.2
  Bottom Layer w10: v2(2922.42,2681.53) 2955,2648.96 v2(2955,2600)
T3C1_MOTOR_PWM: R9.2 R10.2 U1.16 | length 806.3
  Top Layer w10: U1.16 2866.89,3000.98 2930.91,3065 2979.14,3065 2985,3070.86 2985,3165 2979.11,3170.89 2960.61,3170.89 2950.75,3180.75 R10.2 ; R10.2@2951.5,3181.5 2965,3195 2965,3313.96 2978.5,3327.46 2978.5,3418.5 3010,3450 R9.2
T3C2_R_LED: H1.1 R8.2 U1.17 | length 576.4
  Top Layer w10: U1.17 2847.2,3267.2 H1.1 2922.5,3367.5 2922.5,3402.5 2856.5,3468.5 R8.2
T3C3_G_LED: H4.5 R7.2 U1.18 | length 527.8
  Top Layer w10: R7.2 2775,3400 H4.5 2826.52,3348.48 2826.52,2963.48 U1.18
T3C4_B_LED: H4.4 R6.2 U1.19 | length 754.3
  Top Layer w10: R6.2 2655,3605 2720,3540 H4.4 2807.83,3267.17 U1.19
USB_D_N: j4.A7 j4.B7 U4.1 | length 254.5
  Top Layer w10: j4.B7 1294.51,3153.62 1317.19,3153.62 1327.24,3143.57 1327.24,3126.11 1317.19,3116.06 1294.51,3116.06 j4.A7 1317.19,3115.16 1320,3115.16 1355,3115.16 1355,3109.67 1385,3109.67 1385,3115.32 1417.09,3147.4 U4.1
USB_D_P: j4.A6 j4.B6 U4.3 | length 244.9
  Top Layer w10: j4.A6@1299.32,3133.94 1270.01,3133.94 1259.96,3123.89 1259.96,3106.43 1272.72,3093.67 1395.26,3093.67 1416.33,3072.6 U4.3
USB_DETECT: R20.1 R24.2 U5.8 | length 272.2
  Top Layer w10: R24.2@1446.5,2805 1439.5,2812 1439.5,2831.2 1430.2,2840.5 1425.44,2840.5 1419,2846.94 1419,2893.06 1425.94,2900 1554.76,2900 1559.01,2895.75 1583.07,2895.75 U5.8
USB_RX: U1.31 U5.18 | length 1048
  Top Layer w10: U5.18 1706.93,2874.25 1721.75,2874.25 1723.62,2872.38 1726.57,2872.38 1734.74,2864.2 1734.74,2777.36 1740.6,2771.5 2431.5,2771.5 v2(2450,2790) ; v2(2510,2785) 2510.16,2785.16 2650.2,2785.16 U1.31
  Bottom Layer w10: v2(2450,2790) 2505,2790 v2(2510,2785)
USB_TX: U1.30 U5.17 | length 1068
  Top Layer w10: U5.17 1710.21,2855.47 1711.12,2854.57 1711.12,2825.33 1706.02,2820.23 1706.02,2761.36 1711.88,2755.5 2443.85,2755.5 2493.35,2805 U1.30
VUSB: C14.1 FB3.1 j4.A4/B9 j4.B4/A9 R20.2 U3.3 U3.5 U4.5 | length 2574.1
  Top Layer w27: j4.A4/B9 1358.99,3219.49 1369.59,3208.88 1369.59,3195 1369.59,3154.73
  Top Layer w30: 1327.01,3032.99 1342.99,3032.99 v2(1360,3050) ; v2(1369.59,3136.68) 1369.59,3154.73 ; 1369.59,3195 1396.8,3195 1401.3,3190.5 1561.36,3190.5 1586.71,3165.15 1586.71,3129.66 1569.27,3112.21 1542.32,3112.21 U4.5 ; v2(1470,2620) 1725,2365 1725,2056.5 1770,2011.5 1771.5,2011.5 C14.1 1855.39,2008 1857.6,2005.8 U3.3 1859.8,2002.91 1859.8,1975.98 1892.8,1942.98 1892.8,1897.09 U3.5 1897.21,1892.68 1897.21,1865.73 1969.45,1793.5 FB3.1 ; v2(1480,2745) 1510,2775 1510,2833.5 1513.5,2837 1516.5,2837 1553.5,2800 v2(1565,2800) ; 1569.25,3107.8 1604.25,3072.81 1604.25,3058.03 v2(1639.24,3023.04)
  Bottom Layer w30: v2(1360,3050) 1369.59,3059.59 v2(1369.59,3136.68) ; v2(1470,2620) 1465,2625 1465,2730 v2(1480,2745) ; v2(1565,2800) 1565,2950 1630,3015 1631.2,3015 v2(1639.24,3023.04)
WAKE_UP: R19.1 R23.2 U5.13 | length 509.9
  Top Layer w10: R19.1 1378.5,2872 1345.5,2839 1345.5,2780.44 1420.94,2705 1453.23,2705 1454.23,2704 1475.77,2704 1476.77,2705 R23.2 1544.68,2717.68 1559.04,2717.68 1565.49,2724.13 1565.49,2729.55 1576.94,2741 1601.67,2741 1634.25,2773.58 1634.25,2823.07 U5.13
pads on no net: j4. j4.A8 j4.B8 U5.1 U5.2 U5.10 U5.11 U5.14 U5.15 U5.16

## Polygon pours and split planes (outlines as drawn)
GND on Bottom Layer "GND_BOT" (solid, remove dead copper, pour order 2): 1490,1720 1000,2210 1000,4295 3865,4295 4005,4155 4150,4010 4150,1720
GND on Top Layer "GND_TOP" (solid, remove dead copper, pour order 1): 1490,1720 1000,2210 1000,4295 3865,4295 4005,4155 4150,4010 4150,1720

## Other copper
Top Layer:
  rectangle net VUSB: 1270,3020 1342.99,3040

## Silkscreen, mask and mechanical layers (free items; w line width, h text height)
Top Overlay:
  drawing of 1294 lines, arcs and shapes, not listed
  text "GND" at 2590,3930 h30
  text "12V" at 2835,3930 h30
  text "GND" at 3045,3930 h30
  text "ANEMO" at 3205,3930 h30
  text "BOOT" at 3615,3790 h30
  text "POWER JACK / 12V" at 1120,3740 h30
  text "9" at 3580,3419.85 h30
  text "8" at 3685,3419.85 h30
  text "7" at 3788.78,3419.85 h30
  text "6" at 3885,3419.85 h30
  text "5" at 3985,3419.85 h30
  text "4" at 4080,3419.85 h30
  text "USBC" at 1160,3335 h30
  text "IO PINS" at 3470,3322.48 h30 r270
  text "PB11" at 2400,3302.49 h30 r270
  text "PB10" at 2501.88,3302.49 h30 r270
  text "PB2" at 2603.75,3302.49 h30 r270
  text "BLUE" at 2705.62,3302.49 h30 r270
  text "GREEN" at 2807.5,3302.49 h30 r270
  text "RED" at 2909.38,3302.49 h30 r270
  text "PA5" at 3011.25,3302.49 h30 r270
  text "PA4" at 3113.12,3302.49 h30 r270
  text "ESPRX" at 3210,3302.49 h30 r270
  text "PB12" at 2160,3195 h30
  text "PB13" at 2160,3090 h30
  text "ESPTX" at 3275,3030 h30
  text "PB14" at 2160,2985 h30
  text "PA1" at 3275,2925 h30
  text "PB15" at 2160,2885 h30
  text "UART" at 1855,2865 h30
  text "PF1" at 3275,2820 h30
  text "PA8" at 2184.99,2790 h30
  text "PF0" at 3275,2715 h30
  text "PA11" at 2170,2680 h30
  text "PC15" at 3275,2620 h30
  text "PA12" at 2160,2570 h30
  text "PC14" at 3275,2520 h30
  text "POWER" at 1935,2500 h30
  text "PF6" at 2184.99,2470 h30
  text "PC13" at 3275,2420 h30
  text "PF7" at 2184.99,2370 h30
  text "IO PINS" at 3525,2347.48 h30 r270
  text "10" at 3635,2295 h30
  text "3" at 3745,2295 h30
  text "2" at 3845,2295 h30
  text "1" at 3950,2295 h30
  text "0" at 4045,2295 h30
  text "PA15" at 2555,2230 h30 r270
  text "PB3" at 2660,2230 h30 r270
  text "PB4" at 2760,2230 h30 r270
  text "PB5" at 2860,2230 h30 r270
  text "PB6" at 2960,2230 h30 r270
  text "DCDC" at 1565,2180 h30
  text "MCU PROGRAMMER" at 3345,2045 h30
  text "SWCLCK" at 3365,2035 h30 r270
  text "SWDIO" at 3570,2000 h30 r270
  text "DHT11" at 2555,1992.47 h30 r270
  text "OLED" at 3000,1980 h30
  text "GND" at 2455,1947.48 h30 r270
  text "SDA" at 2810,1947.48 h30 r270
  text "SCL" at 2913.78,1947.48 h30 r270
  text "3V3" at 3005,1947.48 h30 r270
  text "GND" at 3105,1947.48 h30 r270
  text "3V3" at 3265,1947.48 h30 r270
  text "GND" at 3465,1947.48 h30 r270
  text "RST" at 3655,1947.48 h30 r270
  text "GND" at 4015,1947.48 h30 r270
  text "ESP USBD" at 3890.02,1940 h30
  text "5V" at 2660,1922.51 h30 r270
  text "D-" at 3815,1922.51 h30 r270
  text "D+" at 3925,1922.51 h30 r270
Board Shape:
  the board outline again, w10

## Text inside footprints (layer, text, board x,y; h text height)
D3: Top Overlay "+" at 1900,2370 h35
D4: Top Overlay "+" at 1823,3118 h35 r270
D5: Top Overlay "+" at 1953,3118 h35 r270